# Altium PCB PCB.PcbDoc
Units mil, origin at the board's own origin, x right, y up, seen from the top; angles counter-clockwise.
Board outline 4230 x 3870 mil, 2 copper layers (Top Layer, Bottom Layer); 73 components, 41 nets, 199 pads, 0 vias.
Unrouted connection lines stored in the file: 152.
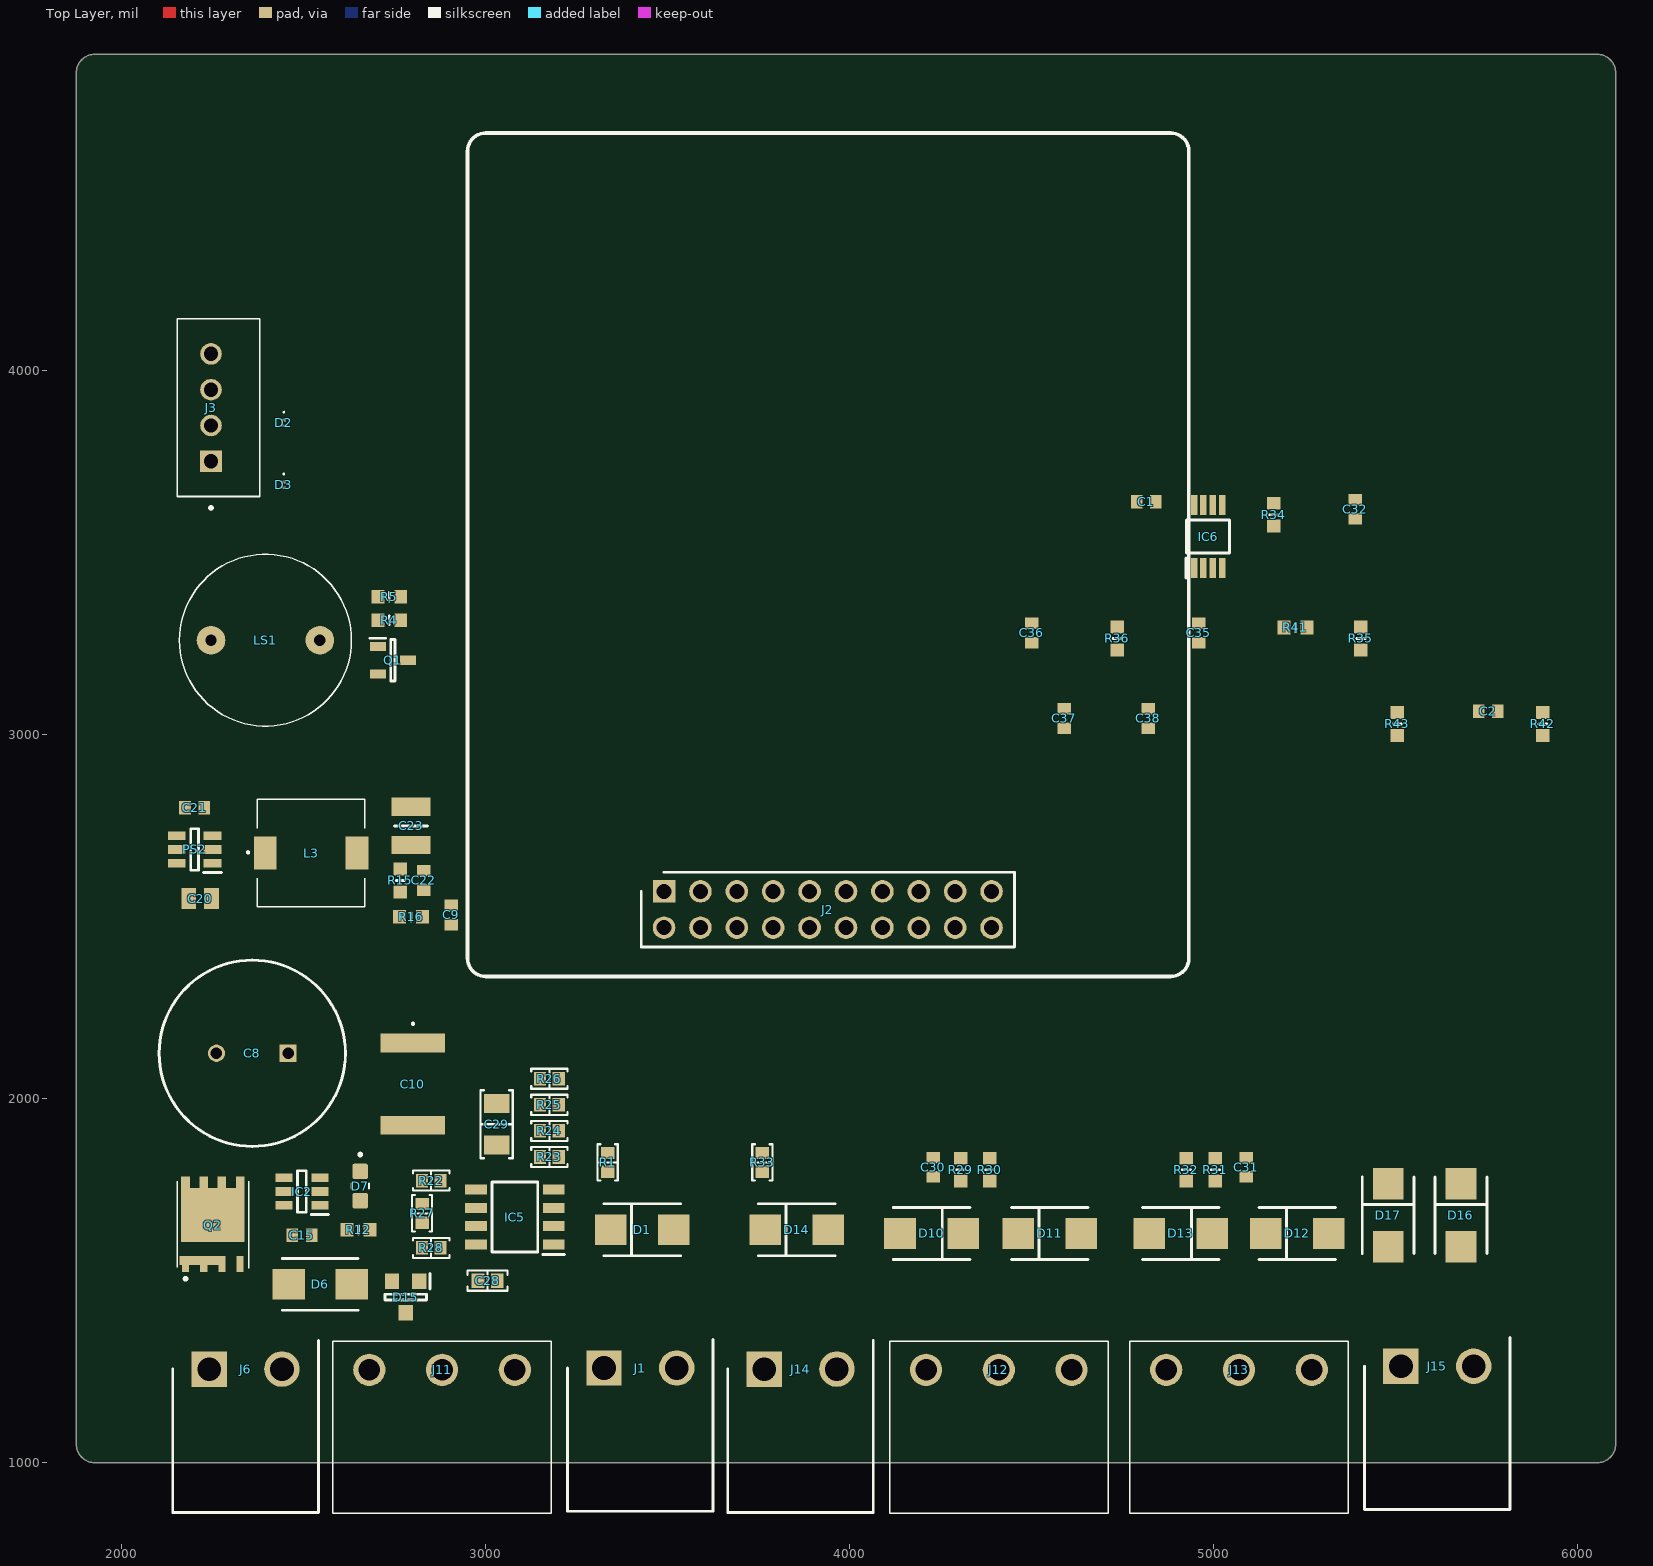
[diagram p0: Top Layer view]
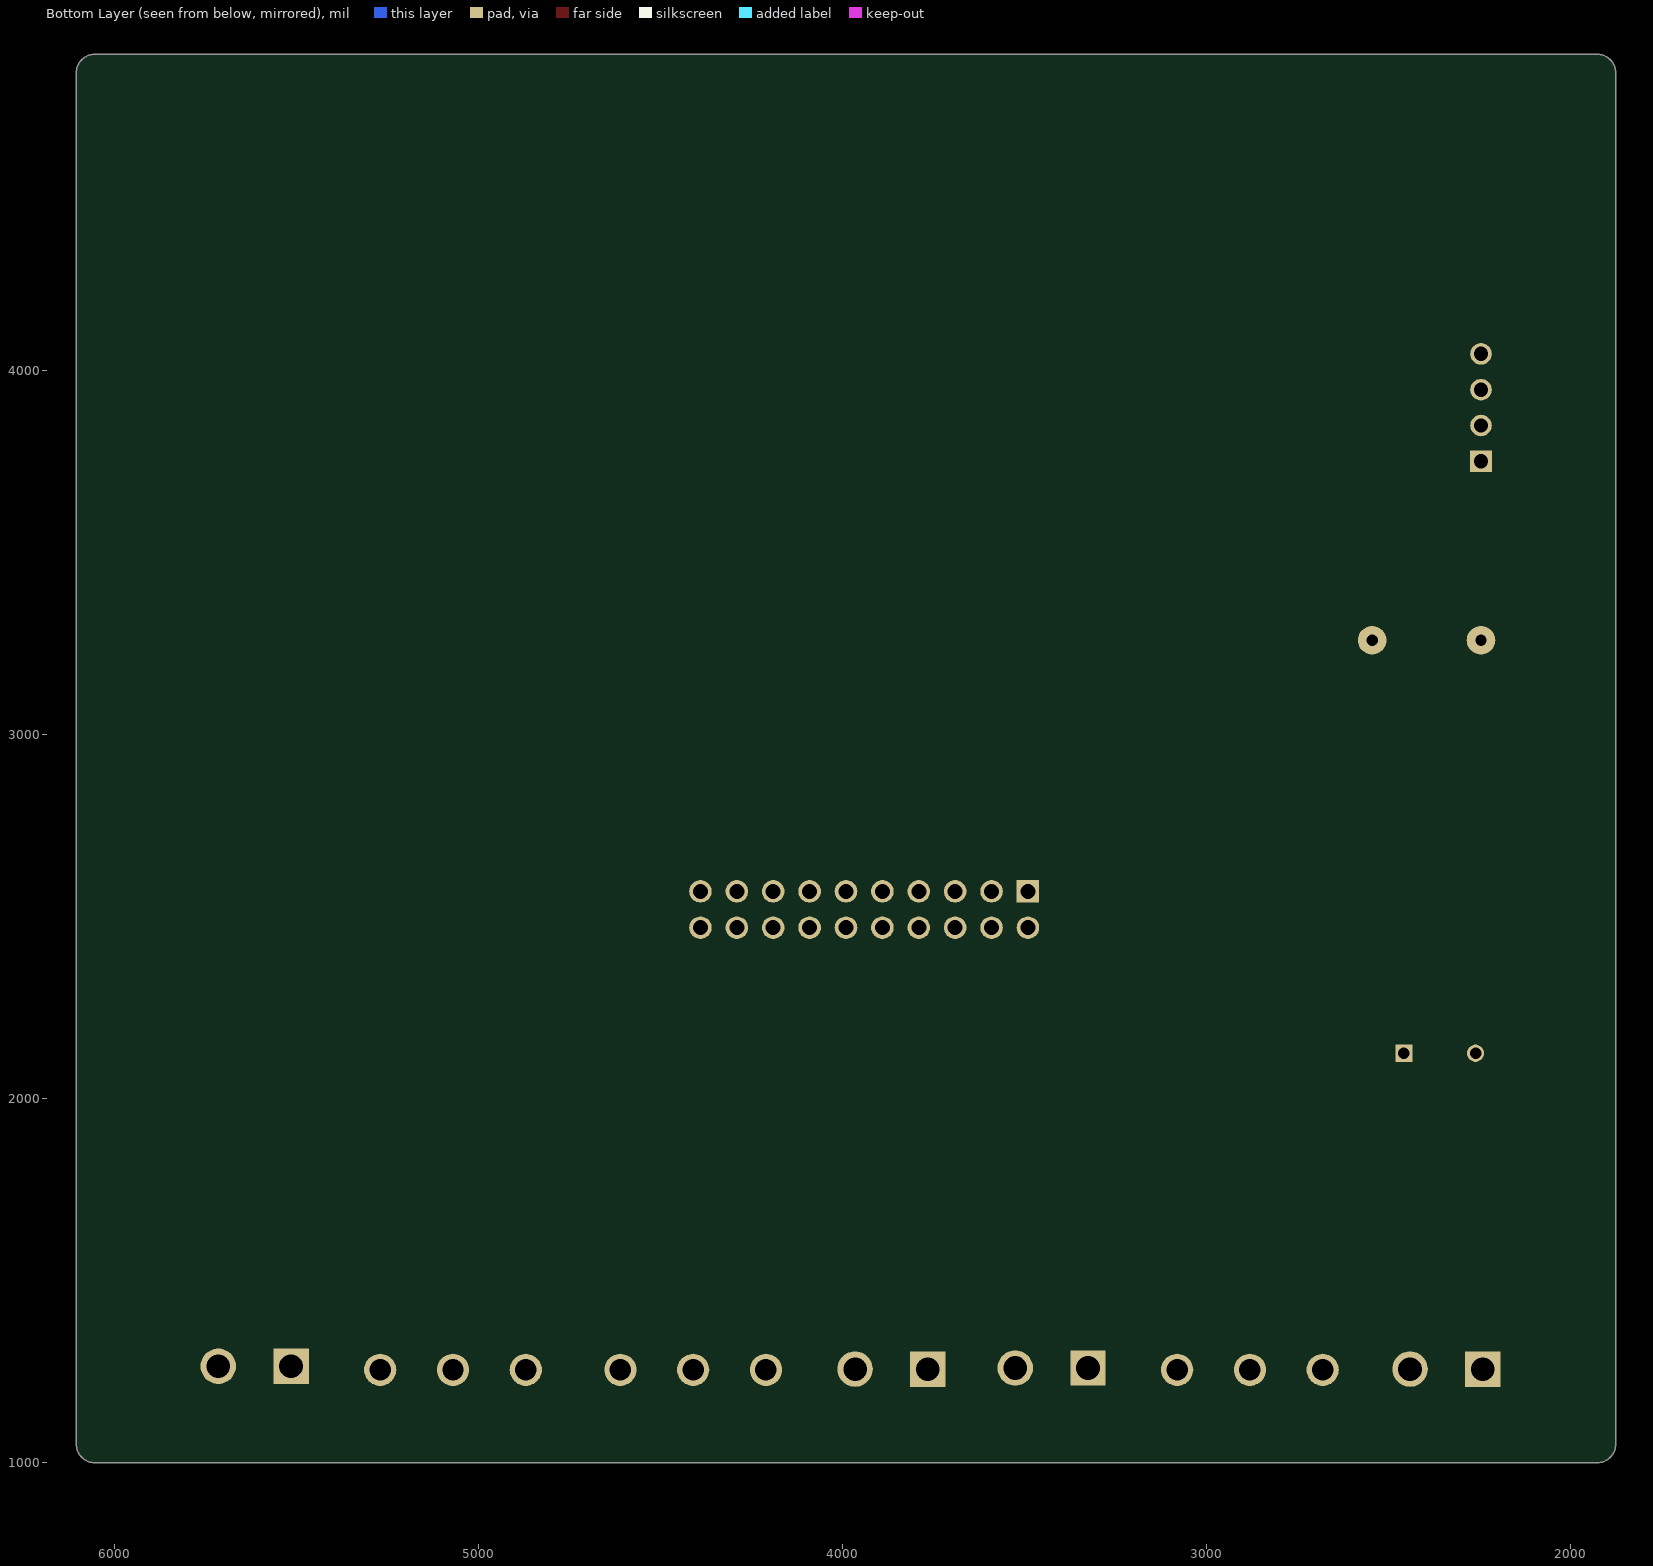
[diagram p1: Bottom Layer view, seen from below]

## Layer stack, top to bottom
Top Solder: solder mask 0.4, Solder Resist, Dk 3.5
Top Layer: signal copper 1.4
Dielectric 1: dielectric 12.6, FR-4, Dk 4.8
Bottom Layer: signal copper 1.4
Bottom Solder: solder mask 0.4, Solder Resist, Dk 3.5

## Board outline
1875,1050 1875,4820 cw(c1925,4820) 1925,4870 6055,4870 cw(c6055,4820) 6105,4820 6105,1050 cw(c6055,1050) 6055,1000 1925,1000 cw(c1925,1050)

## Design rules (kind name [scope] priority, off if disabled: settings)
Clearance [All] p1: gap=10 ignorepadtopadclearanceinfootprint=FALSE except(0: Arc-Hole Track-Hole SMDPad-Hole THPad-Hole Via-Hole Fill-Hole Poly-Hole Region-Hole Text-Hole)
PolygonConnect [All] p1: connectstyle=Relief reliefconductorwidth=10 reliefentries=4 polygonreliefangle="90 Angle" airgapwidth=10
RoutingVias [All] p1: holewidth=28 width=50 viastyle="Through Hole" minholewidth=28 minwidth=50 maxholewidth=28 maxwidth=50
SolderMaskExpansion [All] p1: expansion=4 istentingtop=FALSE
Width [All] p1: maxlimit=10 minlimit=10 preferedwidth=10
30 further rules are at their usual default settings.

## Classes and differential pairs
component class RS485: C28 C29 D15 IC5 J11 R22 R23 R24 R25 R26 R27 R28
component class PWR: C8 C9 C10 C15 C20 C21 C22 C23 D6 D7 IC2 J6 L3 PS2 Q2 R12 R15 R16
component class Pinout: D1 D2 D3 J1 J2 J3 LS1 Q1 R1 R4 R5
component class DAC_OUT: D14 J14 R33
component class ADC: C1 C2 C30 C31 C32 C35 C36 C37 C38 D10 D11 D12 D13 D16 D17 IC6 J12 J13 J15 R29 R30 R31 R32 R34 R35 R36 R41 R42 R43

## Components (designator, comment, footprint, x,y, rotation, side; value= is the part's Value field where it differs from the comment)
C1 "0.1 uF" CAP0603 4815,3640 r0 top
C2 "0.1 uF" CAP0603 5755,3065 r0 top
C8 "MAL213651471E3" CAPPRD500W60D1300H2700 2456.85,2125 r180 top
C9 "2.2 uF" CAP0603 2905,2505 r270 top
C10 "C5750X5R1H106K230KA" C5750_Commercial 2800,2040 r270 top
C15 "0.1 uF" CAP0603 2495,1625 r0 top
C20 "C0805C104M5RAC-TU" CAPC2012X88N 2215,2550 r180 top
C21 "C5750X5R1H106K230KA" CAP0603 2200,2800 r0 top
C22 "CGA1A2C0G1E820J030BA" CAP0603 2830,2600 r90 top
C23 "GRM32ER61C476KE15L" CAPC3225X270N 2795,2750 r270 top
C28 "0.1 µF" "CAP 0603_1608" 3005,1500 r180 top
C29 "10µF" "CAP 1206_3216 - 1.8MM" 3030,1930 r270 top
C30 "0.1 uF" CAP0603 4230,1811.89 r270 top
C31 "0.1 uF" CAP0603 5090,1811.89 r270 top
C32 "0.1 uF" CAP0603 5390,3620 r90 top
C35 "0.1 uF" CAP0603 4960,3280 r90 top
C36 "10 uF" CAP0603 4500,3280 r90 top
C37 "10 uF" CAP0603 4590,3045 r90 top
C38 "0.1 uF" CAP0603 4820,3045 r90 top
D1 "SMBJ5.0A" SMBJ12A 3430,1640 r0 top
D2 "DESD3V3Z1BCSF-7" DESD3V3Z1BCSF7 2445,3857.13 r270 top
D3 "DESD3V3Z1BCSF-7" DESD3V3Z1BCSF7 2445,3687.13 r270 top
D6 "SMBJ24CA-13-F" DIONM5336X250N 2545,1490 r0 top
D7 "LED_SMD" LEDSC125X200X90-2N 2655,1760 r270 top
D10 "SMBJ5.0A" SMBJ12A 4225,1630 r180 top
D11 "SMBJ5.0A" SMBJ12A 4550,1630 r0 top
D12 "SMBJ5.0A" SMBJ12A 5230,1630 r0 top
D13 "SMBJ5.0A" SMBJ12A 4910,1630 r180 top
D14 "SMBJ5.0A" SMBJ12A 3855,1640 r0 top
D15 "SM712" SOT95P240X115-3N 2780,1455 r270 top
D16 "SMBJ5.0A" SMBJ12A 5680,1680 r270 top
D17 "SMBJ5.0A" SMBJ12A 5480,1680 r270 top
IC2 "LM74700QDBVTQ1" SOT95P280X145-6N 2495,1745 r180 top
IC5 "MAX485ECSA+" SOIC127P600X175-8N 3080,1675 r180 top
IC6 "INA317IDGKR" SOP65P490X110-8N 4985,3545 r90 top
J1 "282815-2" SHDRRA2W102P0X508_1X2_1016X1200X850P 3325,1260 r180 top
J2 "10-89-7200" HDRV20W87P254_2X10_2553X508X864P 3490,2570 r180 top locked
J3 "DISPLAY" JST_B4B-XH-A(LF)(SN) 2265.67,3899.21 r270 top
J6 "282815-2" SHDRRA2W102P0X508_1X2_1016X1200X850P 2240,1256.97 r180 top
J11 "282815-3" 2828153 2680,1255 r0 top
J12 "282815-3" 2828153 4210,1255 r0 top
J13 "282815-3" 2828153 4870,1255 r0 top
J14 "282815-2" SHDRRA2W102P0X508_1X2_1016X1200X850P 3765,1256.97 r180 top
J15 "282815-2" SHDRRA2W102P0X508_1X2_1016X1200X850P 5515,1265 r180 top
L3 "PA4302.103NLT" PA4302103NLT 2520,2675 r90 top
LS1 "CMI-1295IC-0585T" CMI1295IC0585T 2544.21,3260 r180 top
PS2 "TPS54202DDCR" SOT95P280X110-6N 2200,2685 r180 top
Q1 "DMG3415U-7" SOT96P240X110-3N 2745,3205 r0 top
Q2 "BSC014N06NSATMA1" BSC010N04LS6ATMA1 2250,1655 r0 top
R1 "10 kOhms" "RES 0603_1608" 3335,1825 r270 top
R4 "300R" RES0603 2735,3315 r0 top
R5 "10K" RES0603 2735,3380 r0 top
R12 "1K" RES0603 2650,1640 r0 top
R15 "CRCW0402100KFKEDHP" RES0603 2765,2600 r90 top
R16 "CRCW040213K7FKEDHP" RES0603 2795,2500 r180 top
R22 "20 kOhms" "RES 0603_1608" 2850,1775 r0 top
R23 "10 kOhms" "RES 0603_1608" 3175,1840 r180 top
R24 "10 kOhms" "RES 0603_1608" 3175,1911.67 r180 top
R25 "10 kOhms" "RES 0603_1608" 3175,1983.33 r180 top
R26 "10 kOhms" "RES 0603_1608" 3175,2055 r180 top
R27 "120" "RES 0603_1608" 2825,1685 r270 top
R28 "20 kOhms" "RES 0603_1608" 2850,1590 r180 top
R29 "68k" RES0603 4305,1805 r90 top
R30 "10K" RES0603 4385,1805 r270 top
R31 "68k" RES0603 5005,1805 r90 top
R32 "10K" RES0603 4925,1805 r270 top
R33 "10 kOhms" "RES 0603_1608" 3760,1825 r270 top
R34 "100R" RES0603 5165,3605 r90 top
R35 "100R" RES0603 5405,3265 r90 top
R36 "100R" RES0603 4735,3265 r90 top
R41 "10K" RES0603 5225,3295 r0 top
R42 "10K" RES0603 5905,3030 r90 top
R43 "10K" RES0603 5505,3030 r90 top

## Footprints (in the part's own frame and the unit in brackets; to place one, negate y for a bottom-side part, rotate by r counter-clockwise, add the part's x,y. Pads: shape width x height; smd on the part's side, far side on the other; paste and mask are expansions set on the pad)
2828153 [mm]
  round 2.25 hole 1.5: 1(0,0) 2(5.08,0) 3(10.16,0)
  silkscreen extent -2.54,-10 12.7,2, body extent -2.54,-10 12.7,2, height 8.46
BSC010N04LS6ATMA1 [mm]
  rect 0.5x0.5 smd: 1(-1.905,-3.075) 2(-0.635,-3.075) 3(0.635,-3.075)
  rect 0.5x1.1 smd: 4(1.905,-2.775)
  rect 0.6x0.8 smd: 5(1.905,2.925) 6(0.635,2.925) 7(-0.635,2.925) 8(-1.905,2.925)
  rect 4.41x3.75 smd: 9(0,0.65)
  rect 3.2x0.6 smd: 10(-0.715,-2.525)
  silkscreen extent -2.5,-3.9 2.5,3, body extent -2.7,-3.08 2.7,3.08, height 1.1
C5750_Commercial [mm]
  rect 1.3x4.5 smd: 1(-2.875,0) 2(2.875,0)
  silkscreen extent -4.27,-0.05 -4.18,0.05, body extent -2.65,-2.45 2.65,2.45, height 2.77
CAP0603 [mm]
  rect 0.81x0.94 smd: 1(-0.67,0) 2(0.67,0)
  body extent -0.8,-0.4 0.8,0.4, height 0.9
"CAP 0603_1608" [mm]
  rect 0.9x1 smd: 1(-0.675,0) 2(0.675,0)
  silkscreen extent -1.4,-0.7 1.4,0.7, body extent -0.8,-0.41 0.8,0.41, height 0.82
"CAP 1206_3216 - 1.8MM" [mm]
  rect 1.3x1.8 smd: 1(-1.45,0) 2(1.45,0)
  silkscreen extent -2.37,-1.12 2.37,1.12, body extent -1.6,-0.8 1.6,0.8, height 1.8
CAPC2012X88N [mm]
  rect 1.02x1.47 smd: 1(-0.8,0) 2(0.8,0)
  body extent -1.1,-0.73 1.1,0.72, height 0.88
CAPC3225X270N [mm]
  rect 1.26x2.72 smd: 1(-1.33,0) 2(1.33,0)
  silkscreen extent 0,-1.15 0,1.15, body extent -1.6,-1.25 1.6,1.25, height 2.7
CAPPRD500W60D1300H2700 [mm]
  rect 1.2x1.2 hole 0.8: 1(0,0)
  round 1.2 hole 0.8: 2(5,0)
  silkscreen extent -4,-6.5 9,6.5, body extent -3.96,-6.49 9.03,6.49, height 25
CMI1295IC0585T [mm]
  round 2 hole 0.8: 1(0,0) 2(7.6,0)
  silkscreen extent -2.2,-6 9.8,6, body extent -2.19,-5.99 9.81,6, height 9.63
DESD3V3Z1BCSF7 [mm]
  rect 0.194x0.291 smd: 1(-0.2,0) 2(0.2,0)
  silkscreen extent -0.8,-0.05 -0.7,0.05, body extent -0.3,-0.15 0.3,0.15, height 0.42
DIONM5336X250N [mm]
  rect 2.25x2.15 smd: 1(-2.2,0) 2(2.2,0)
  silkscreen extent -2.65,-1.81 2.65,1.81, body extent -2.8,-1.97 2.8,1.97, height 2.57
HDRV20W87P254_2X10_2553X508X864P [mm]
  rect 1.575x1.575 hole 1.05: 1(0,0)
  round 1.575 hole 1.05: 2(0,2.54) 3(-2.54,0) 4(-2.54,2.54) 5(-5.08,0) 6(-5.08,2.54) 7(-7.62,0) 8(-7.62,2.54) 9(-10.16,0) 10(-10.16,2.54) 11(-12.7,0) 12(-12.7,2.54) 13(-15.24,0) 14(-15.24,2.54) 15(-17.78,0) 16(-17.78,2.54) 17(-20.32,0) 18(-20.32,2.54) 19(-22.86,0) 20(-22.86,2.54)
  silkscreen extent -24.45,-1.34 1.59,3.88, body extent -24.13,-1.27 1.27,3.81, height 8.45
JST_B4B-XH-A(LF)(SN) [mm]
  rect 1.508x1.508 / inner round 1.508 / far side rect 1.508x1.508 hole 1: 1(3.75,-0.525)
  round 1.508 hole 1: 2(1.25,-0.525) 3(-1.25,-0.525) 4(-3.75,-0.525)
  silkscreen extent -6.2,-2.88 7.1,2.88, body extent -6.2,-2.88 6.2,2.88, height 7
LEDSC125X200X90-2N [mm]
  rrect25% 1.07x1.08 smd: A(1.025,0) C(-1.025,0)
  silkscreen extent -2.3,-0.63 0.17,0.63, body extent -1,-0.63 1,0.63, height 0.7
PA4302103NLT [mm]
  rect 2.3x1.6 smd: 1(0,3.2) 2(0,-3.2)
  silkscreen extent -3.75,-3.75 3.75,4.45, body extent -3.75,-3.84 3.75,3.84, height 5.7
RES0603 [mm]
  rect 0.9x0.95 smd: 1(-0.8,0) 2(0.8,0)
  silkscreen extent 0,-0.3 0,0.3, body extent -0.8,-0.4 0.8,0.4, height 0.55
"RES 0603_1608" [mm]
  rect 0.85x0.95 smd: 1(-0.65,0) 2(0.65,0)
  silkscreen extent -1.27,-0.7 1.27,0.7, body extent -0.8,-0.4 0.8,0.4, height 0.45
SHDRRA2W102P0X508_1X2_1016X1200X850P [mm]
  rect 2.475x2.475 hole 1.65: 1(0,0)
  round 2.475 hole 1.65: 2(-5.08,0)
  silkscreen extent -7.62,-2 2.54,10, body extent -7.62,-2 2.54,10, height 8.35
SMBJ12A [mm]
  rect 2.2x2.15 smd: 1(-2.2,0) 2(2.2,0)
  silkscreen extent -2.68,-1.81 2.68,1.81, body extent -2.68,-1.86 2.68,1.86, height 2.33
SOIC127P600X175-8N [mm]
  rect 1.525x0.7 smd: 1(-2.712,1.905) 2(-2.712,0.635) 3(-2.712,-0.635) 4(-2.712,-1.905) 5(2.712,-1.905) 6(2.712,-0.635) 7(2.712,0.635) 8(2.712,1.905)
  silkscreen extent -3.47,-2.45 1.6,2.61, body extent -3,-2.45 3,2.45, height 1.75
SOP65P490X110-8N [mm]
  rect 1.4x0.45 smd: 1(-2.2,0.975) 2(-2.2,0.325) 3(-2.2,-0.325) 4(-2.2,-0.975) 5(2.2,-0.975) 6(2.2,-0.325) 7(2.2,0.325) 8(2.2,0.975)
  silkscreen extent -2.9,-1.5 1.15,1.55, body extent -2.45,-1.5 2.45,1.5, height 1.1
SOT95P240X115-3N [mm]
  rect 1.1x1 smd: 1(-1.1,0.95) 2(-1.1,-0.95) 3(1.1,0)
  silkscreen extent -1.65,-1.45 0.2,1.7, body extent -1.2,-1.45 1.2,1.45, height 1.15
SOT95P280X110-6N [mm]
  rect 1.25x0.6 smd: 1(-1.25,0.95) 2(-1.25,0) 3(-1.25,-0.95) 4(1.25,-0.95) 5(1.25,0) 6(1.25,0.95)
  silkscreen extent -1.88,-1.45 0.28,1.6, body extent -1.4,-1.45 1.4,1.45, height 1.1
SOT95P280X145-6N [mm]
  rect 1.2x0.6 smd: 1(-1.25,0.95) 2(-1.25,0) 3(-1.25,-0.95) 4(1.25,-0.95) 5(1.25,0) 6(1.25,0.95)
  silkscreen extent -1.85,-1.45 0.3,1.6, body extent -1.4,-1.45 1.4,1.45, height 1.2
SOT96P240X110-3N [mm]
  rect 1.1x0.65 smd: 1(-1.05,0.96) 2(-1.05,-0.96) 3(1.05,0)
  silkscreen extent -1.6,-1.45 0.15,1.54, body extent -1.2,-1.45 1.2,1.45, height 1.1

## Part data
C1 C2 C9 C15 C30 C31 C32 C35 C36 C37 C38: library part CC0603KRX7R9BB104, "Capacitor", Manufacturer_Name=YAGEO, Mouser Part Number=603-CC603KRX7R9BB104, Arrow Part Number=CC0603KRX7R9BB104, Arrow Price/Stock=https://www.arrow.com/en/products/cc0603krx7r9bb104/yageo?utm_currency=USD&region=europe, Datasheet Link=https://componentsearchengine.com/Datasheets/2/CC0603KRX7R9BB104.pdf, Height=0.9mm, Manufacturer_Part_Number=CC0603KRX7R9BB104, Mouser Price/Stock=https://www.mouser.co.uk/ProductDetail/YAGEO/CC0603KRX7R9BB104?qs=vTakOoo5QyLvVCYM2ge8LQ%3D%3D
C8: "Capacitor Polarised", Manufacturer_Name=Vishay, Mouser Part Number=594-2222-136-51471, Datasheet Link=https://www.mouser.co.uk/datasheet/2/427/136rvi-1762300.pdf, Height=27mm, Manufacturer_Part_Number=MAL213651471E3, Mouser Price/Stock=https://www.mouser.co.uk/ProductDetail/Vishay-BC-Components/MAL213651471E3?qs=zGH8QOQ14qXx9%252BWDTpPwWA%3D%3D
C10 C21: "Capacitor", Manufacturer_Name=TDK, Mouser Part Number=810-C5750X5R1H106K, Arrow Part Number=C5750X5R1H106K230KA, Arrow Price/Stock=https://www.arrow.com/en/products/c5750x5r1h106k230ka/tdk?region=nac, Datasheet Link=https://product.tdk.com/system/files/dam/doc/product/capacitor/ceramic/mlcc/catalog/mlcc_commercial_general_en.pdf, Height=2.5mm, Manufacturer_Part_Number=C5750X5R1H106K230KA, Mouser Price/Stock=https://www.mouser.co.uk/ProductDetail/TDK/C5750X5R1H106K230KA?qs=NRhsANhppD8lVYAvl0MZ3g%3D%3D
C20: "Capacitor", Manufacturer_Name="Yageo Group", Arrow Part Number=C0805C104M5RAC-TU, Arrow Price/Stock=https://www.arrow.com/en/products/c0805c104m5ractu/kemet-corporation?region=nac, Datasheet Link=https://connect.kemet.com:7667/gateway/IntelliData-ComponentDocumentation/1.0/download/specsheet/C0805C104M5RACTU, Height=0.88mm, Manufacturer_Part_Number=C0805C104M5RAC-TU
C22: "Capacitor", Manufacturer_Name=TDK, Datasheet Link=https://product.tdk.com/system/files/dam/doc/product/capacitor/ceramic/mlcc/catalog/mlcc_automotive_general_en.pdf, Height=0.33mm, Manufacturer_Part_Number=CGA1A2C0G1E820J030BA
C23: "Capacitor", Manufacturer_Name="Murata Electronics", Mouser Part Number=81-GRM32ER61C476KE5L, Arrow Part Number=GRM32ER61C476KE15L, Arrow Price/Stock=https://www.arrow.com/en/products/grm32er61c476ke15l/murata-manufacturing?utm_currency=USD&region=europe, Datasheet Link=https://search.murata.co.jp/Ceramy/image/img/A01X/G101/ENG/GRM32ER61C476KE15-01A.pdf, Height=2.7mm, Manufacturer_Part_Number=GRM32ER61C476KE15L, Mouser Price/Stock=https://www.mouser.co.uk/ProductDetail/Murata-Electronics/GRM32ER61C476KE15L?qs=%252B%2F7tQhzlcy7Im%2F1Gh2YSGQ%3D%3D
C28: library part C0603C104K5RAC7411, "CAP CER 0.1UF 50V X7R 0603", Device Package="0603 (1608 Metric)", manufacturer=KEMET, Operating Temperature="-55°C ~ 125°C", Supplier Part Number 1=399-7374-2-ND, Temperature Coefficient=X7R, Tolerance=±10%, Voltage - Rated=50V, Applications="Bypass, Decoupling", Capacitance="0.1 µF", componentlink1description=Datasheet, componentlink1url=https://api.kemet.com/component-edge/download/datasheet/C0603C104K5RAC7411.pdf, componentlink2description="DigiKey Link", componentlink2url=https://www.digikey.com/en/products/detail/kemet/C0603C104K5RAC7411/3317013, lastupdated="9/19/2022 1:01:20 PM", Lifecycle Status=Active, Minimum Order=15000, Mounting Type="Surface Mount, MLCC", Package / Case="0603 (1608 Metric)", packaging=TapeAndReel, Part Number=C0603C104K5RAC7411, Part Status=Active, partid=2233, Price=0.01, series="SMD Comm X7R", Size / Dimension="0.063\" L x 0.031\" W (1.60mm x 0.80mm)", Supplier 1=DigiKey, Thickness (Max)="0.035\" (0.90mm)"
C29: library part 12065D106KAT2A, "CAP CER 10UF 50V X5R 1206", Device Package="1206 (3216 Metric)", manufacturer="AVX Corporation", Operating Temperature="-55°C ~ 85°C", Supplier Part Number 1=478-9979-1-ND, Temperature Coefficient=X5R, Tolerance=±10%, Voltage - Rated=50V, Applications="General Purpose", Capacitance=10µF, componentlink1description=Datasheet, componentlink1url=http://datasheets.avx.com/cx5r.pdf, componentlink2description="DigiKey Link", componentlink2url=http://digikey.com/product-detail/en/avx-corporation/12065D106KAT2A/478-9979-1-ND/6149060, lastupdated="9/2/2020 1:05:35 AM", Lifecycle Status=Active, Minimum Order=1, Mounting Type="Surface Mount, MLCC", Package / Case="1206 (3216 Metric)", packaging=TapeAndReel, Part Number=12065D106KAT2A, Part Status=Active, partid=21345, Price=0.16, series=-, Size / Dimension="0.126\" L x 0.063\" W (3.20mm x 1.60mm)", Supplier 1=DigiKey, Thickness (Max)="0.071\" (1.80mm)"
D1 D10 D11 D12 D13 D14 D16 D17: "TVS Diode (Uni-directional)", Manufacturer_Name=STMicroelectronics, Datasheet Link=https://www.st.com/resource/en/datasheet/smbj12a.pdf, Height=2.45mm, Manufacturer_Part_Number=SMBJ5.0A
D2 D3: "TVS Diode (Bi-directional)", Manufacturer_Name="Diodes Incorporated", Mouser Part Number=621-DESD3V3Z1BCSF-7, Arrow Part Number=DESD3V3Z1BCSF-7, Arrow Price/Stock=https://www.arrow.com/en/products/desd3v3z1bcsf-7/diodes-incorporated?utm_currency=USD&region=nac, Datasheet Link=https://www.diodes.com/assets/Package-Files/X2-WLB0603-2.pdf, Height=0.32mm, Manufacturer_Part_Number=DESD3V3Z1BCSF-7, Mouser Price/Stock=https://www.mouser.co.uk/ProductDetail/Diodes-Incorporated/DESD3V3Z1BCSF-7?qs=HXFqYaX1Q2xS5VnKZuyjmg%3D%3D
D6: "TVS Diode (Bi-directional)", Manufacturer_Name="Diodes Incorporated", Mouser Part Number=621-SMBJ24CA-13-F, Arrow Part Number=SMBJ24CA-13-F, Arrow Price/Stock=https://www.arrow.com/en/products/smbj24ca-13-f/diodes-incorporated?utm_currency=USD&region=nac, Datasheet Link=https://www.diodes.com/assets/Datasheets/ds19002.pdf, Height=2.5mm, Manufacturer_Part_Number=SMBJ24CA-13-F, Mouser Price/Stock=https://www.mouser.co.uk/ProductDetail/Diodes-Incorporated/SMBJ24CA-13-F?qs=gaDBXWSqsDCkhBi9r6ReOQ%3D%3D
D7: library part 5990110007F, "Red 633nm LED Indication - Discrete 2.1V 0805 (2012 Metric)", Package="0805 Dialight", Availability="In Stock", Check_prices=https://www.snapeda.com/parts/599-0110-007F/Dialight/view-part/?ref=eda, MF=Dialight, MP=599-0110-007F, Price=None, Purchase-URL=https://pricing.snapeda.com/search/part/599-0110-007F/?ref=eda, SnapEDA_Link=https://www.snapeda.com/parts/599-0110-007F/Dialight/view-part/?ref=snap
D15: "TVS Diode (Bi-directional)", Manufacturer_Name=DOWO, Datasheet Link=https://datasheet.lcsc.com/szlcsc/DOWO-SM712_C293966.pdf, Height=1.15mm, Manufacturer_Part_Number=SM712
IC2: library part LM74700-Q1MKX-1_NOPB, "Integrated Circuit", Manufacturer_Name="Texas Instruments", Manufacturer_Part_Number=LM74700-Q1MKX-1/NOPB, Datasheet Link=http://www.ti.com/lit/ds/symlink/lm74700-q1.pdf, Height=1.45mm
IC5: "Integrated Circuit", Manufacturer_Name="Analog Devices", Mouser Part Number=700-MAX485ECSA, Arrow Part Number=MAX485ECSA+, Arrow Price/Stock=https://www.arrow.com/en/products/max485ecsa/analog-devices?utm_currency=USD&region=nac, Datasheet Link=http://datasheets.maximintegrated.com/en/ds/MAX1487E-MAX491E.pdf, Height=1.75mm, Manufacturer_Part_Number=MAX485ECSA+, Mouser Price/Stock=https://www.mouser.co.uk/ProductDetail/Analog-Devices-Maxim-Integrated/MAX485ECSA%2b?qs=1THa7WoU59Gy3FCdT5o1Tg%3D%3D
IC6: "Integrated Circuit", Manufacturer_Name="Texas Instruments", Mouser Part Number=595-INA317IDGKR, Arrow Part Number=INA317IDGKR, Arrow Price/Stock=https://www.arrow.com/en/products/ina317idgkr/texas-instruments?utm_currency=USD&region=nac, Datasheet Link=http://www.ti.com/lit/gpn/ina317, Height=1.1mm, Manufacturer_Part_Number=INA317IDGKR, Mouser Price/Stock=https://www.mouser.co.uk/ProductDetail/Texas-Instruments/INA317IDGKR?qs=W0yvOO0ixfHq371pIwwl1g%3D%3D
J1 J6 J14 J15: "Connector", Manufacturer_Name="TE Connectivity", Mouser Part Number=571-282815-2, Arrow Part Number=282815-2, Arrow Price/Stock=https://www.arrow.com/en/products/282815-2/te-connectivity?region=nac, Datasheet Link=https://www.te.com/commerce/DocumentDelivery/DDEController?Action=srchrtrv&DocNm=1-773958-1&DocType=Data%20Sheet&DocLang=English&PartCntxt=282815-2&DocFormat=pdf, Height=8.5mm, Manufacturer_Part_Number=282815-2, Mouser Price/Stock=https://www.mouser.co.uk/ProductDetail/TE-Connectivity/282815-2?qs=79%2FjLZ2kXkpF7MFURi982A%3D%3D
J2: "Connector", Manufacturer_Name=Molex, Mouser Part Number=538-10-89-7200, Datasheet Link=https://www.molex.com/content/dam/molex/molex-dot-com/products/automated/en-us/salesdrawingpdf/702/70280/010897200_sd.pdf?inline, Height=8.64mm, Manufacturer_Part_Number=10-89-7200, Mouser Price/Stock=https://www.mouser.co.uk/ProductDetail/Molex/10-89-7200?qs=oWQp3ZoCHH25CPUgqQXm8A%3D%3D
J3: library part B4B-XH-A(LF)(SN), "Connector Header Through Hole 4 position 0.098 (2.50mm)", Package=None, Check_prices=https://www.snapeda.com/parts/B4B-XH-A(LF)(SN)/JST+Sales+America+Inc./view-part/?ref=eda, MF="JST Sales", MP=B4B-XH-A(LF)(SN), SnapEDA_Link=https://www.snapeda.com/parts/B4B-XH-A(LF)(SN)/JST+Sales+America+Inc./view-part/?ref=snap
J11 J12 J13: "Connector", Manufacturer_Name="TE Connectivity", Mouser Part Number=571-282815-3, Arrow Part Number=282815-3, Arrow Price/Stock=https://www.arrow.com/en/products/282815-3/te-connectivity, Datasheet Link=https://www.te.com/commerce/DocumentDelivery/DDEController?Action=srchrtrv&DocNm=1-773958-1&DocType=Data%20Sheet&DocLang=English&PartCntxt=282815-3&DocFormat=pdf, Height=8.35mm, Manufacturer_Part_Number=282815-3, Mouser Price/Stock=https://www.mouser.co.uk/ProductDetail/TE-Connectivity/282815-3?qs=79%2FjLZ2kXkqd6grVMiPYfw%3D%3D
L3: "Inductor", Manufacturer_Name="Yageo Group", Mouser Part Number=673-PA4302.103NLT, Arrow Part Number=PA4302.103NLT, Arrow Price/Stock=https://www.arrow.com/en/products/pa4302.103nlt/pulse-electronics-corporation?region=nac, Datasheet Link=https://www.mouser.com/datasheet/2/336/-559356.pdf, Height=5.6mm, Manufacturer_Part_Number=PA4302.103NLT, Mouser Price/Stock=https://www.mouser.co.uk/ProductDetail/Pulse-Electronics/PA4302.103NLT?qs=ZU1dyKYMvyPXoPwo6qMOJg%3D%3D
LS1: "Loudspeaker or Buzzer", Manufacturer_Name="Same Sky", Mouser Part Number=490-CMI-1295IC-0585T, Arrow Part Number=CMI-1295IC-0585T, Arrow Price/Stock=https://www.arrow.com/en/products/cmi-1295ic-0585t/cui-devices?utm_currency=USD&region=nac, Datasheet Link=https://www.sameskydevices.com/product/resource/CMI-1295IC-0585T.pdf, Height=9.7mm, Manufacturer_Part_Number=CMI-1295IC-0585T, Mouser Price/Stock=https://www.mouser.co.uk/ProductDetail/Same-Sky/CMI-1295IC-0585T?qs=OlC7AqGiEDkuskN%2Fok3iNw%3D%3D
PS2: "Power Supply", Manufacturer_Name="Texas Instruments", Mouser Part Number=595-TPS54202DDCR, Arrow Part Number=TPS54202DDCR, Arrow Price/Stock=https://www.arrow.com/en/products/tps54202ddcr/texas-instruments?utm_currency=USD&region=nac, Datasheet Link=http://www.ti.com/lit/gpn/tps54202, Height=1.1mm, Manufacturer_Part_Number=TPS54202DDCR, Mouser Price/Stock=https://www.mouser.co.uk/ProductDetail/Texas-Instruments/TPS54202DDCR?qs=uP22XH7NdCsJtN%2Fq54jCtQ%3D%3D
Q1: "Integrated Circuit", Manufacturer_Name="Lattice Semiconductor", Mouser Part Number=N/A, Datasheet Link=https://media.digikey.com/pdf/Data%20Sheets/Diodes%20PDFs/DMG3415U.pdf, Height=1.1mm, Manufacturer_Part_Number=DMG3415U-7, Mouser Price/Stock=https://www.mouser.com/Search/Refine.aspx?Keyword=N%2FA
Q2: "MOSFET (N-Channel)", Manufacturer_Name=Infineon, Mouser Part Number=726-BSC014N06NSATMA1, Arrow Part Number=BSC014N06NSATMA1, Arrow Price/Stock=https://www.arrow.com/en/products/bsc014n06nsatma1/infineon-technologies-ag?region=nac, Datasheet Link=http://www.farnell.com/datasheets/1849651.html, Height=1.1mm, Manufacturer_Part_Number=BSC014N06NSATMA1, Mouser Price/Stock=https://www.mouser.co.uk/ProductDetail/Infineon-Technologies/BSC014N06NSATMA1?qs=K00xGehIljshgUA78G26tg%3D%3D
R1 R23 R24 R25 R26 R33: library part RT0603FRE0710KL, "RES SMD 10K OHM 1% 1/10W 0603", Device Package="0603 (1608 Metric)", manufacturer=Yageo, Operating Temperature="-55°C ~ 155°C", Power (Watts)="0.1W, 1/10W", Supplier Device Package=0603, Supplier Part Number 1=YAG2321CT-ND, Temperature Coefficient=±50ppm/°C, Tolerance=±1%, componentlink1description=Datasheet, componentlink1url=https://www.yageo.com/upload/media/product/productsearch/datasheet/rchip/PYu-RT_1-to-0.01_RoHS_L_11.pdf, componentlink2description="DigiKey Link", componentlink2url=https://www.digikey.com/en/products/detail/yageo/RT0603FRE0710KL/1075040, Composition="Thin Film", Height - Seated (Max)="0.022\" (0.55mm)", lastupdated="9/19/2022 1:22:31 PM", Lifecycle Status=Active, Minimum Order=1, Number of Terminations=2, Package / Case="0603 (1608 Metric)", packaging=TapeAndReel, Part Number=RT0603FRE0710KL, Part Status=Active, partid=5671, Price=0.01, Resistance="10 kOhms", series=RT, Size / Dimension="0.063\" L x 0.031\" W (1.60mm x 0.80mm)", Supplier 1=DigiKey
R4 R5 R12 R29 R30 R31 R32 R34 R35 R36 R41 R42 R43: library part RES, "Resistor", Manufacturer_Name="UNI-ROYAL(Uniroyal Elec)", Manufacturer_Part_Number=0603WAF1001T5E, Datasheet Link=https://datasheet.lcsc.com/szlcsc/Uniroyal-Elec-0603WAF1001T5E_C21190.pdf, Height=0.55mm
R15: "Resistor", Manufacturer_Name=Vishay, Mouser Part Number=71-CRCW0402100KFKEDH, Arrow Part Number=CRCW0402100KFKEDHP, Arrow Price/Stock=https://www.arrow.com/en/products/crcw0402100kfkedhp/vishay?utm_currency=USD&region=nac, Datasheet Link=http://www.vishay.com/docs/20035/dcrcwe3.pdf, Height=0.4mm, Manufacturer_Part_Number=CRCW0402100KFKEDHP, Mouser Price/Stock=https://www.mouser.co.uk/ProductDetail/Vishay-Dale/CRCW0402100KFKEDHP?qs=k2%2FDWSARqgGFakjlJe4Ejw%3D%3D
R16: "Resistor", Manufacturer_Name=Vishay, Mouser Part Number=N/A, Arrow Part Number=CRCW040213K7FKEDHP, Arrow Price/Stock=https://www.arrow.com/en/products/crcw040213k7fkedhp/vishay?region=nac, Datasheet Link=http://www.vishay.com/docs/20035/dcrcwe3.pdf, Height=0.4mm, Manufacturer_Part_Number=CRCW040213K7FKEDHP, Mouser Price/Stock=https://www.mouser.co.uk/ProductDetail/Vishay-Dale/CRCW040213K7FKEDHP?qs=VAB4DzKv5wWcbGmoe9QIoA%3D%3D
R22 R27 R28: library part RT0603FRE0710KL, "RES SMD 10K OHM 1% 1/10W 0603", Device Package="0603 (1608 Metric)", manufacturer=Yageo, Operating Temperature="-55°C ~ 155°C", Power (Watts)="0.1W, 1/10W", Resistance="10 kOhms", Supplier Device Package=0603, Supplier Part Number 1=YAG2321CT-ND, Temperature Coefficient=±50ppm/°C, Tolerance=±1%, componentlink1description=Datasheet, componentlink1url=https://www.yageo.com/upload/media/product/productsearch/datasheet/rchip/PYu-RT_1-to-0.01_RoHS_L_11.pdf, componentlink2description="DigiKey Link", componentlink2url=https://www.digikey.com/en/products/detail/yageo/RT0603FRE0710KL/1075040, Composition="Thin Film", Height - Seated (Max)="0.022\" (0.55mm)", lastupdated="9/19/2022 1:22:31 PM", Lifecycle Status=Active, Minimum Order=1, Number of Terminations=2, Package / Case="0603 (1608 Metric)", packaging=TapeAndReel, Part Number=RT0603FRE0710KL, Part Status=Active, partid=5671, Price=0.01, series=RT, Size / Dimension="0.063\" L x 0.031\" W (1.60mm x 0.80mm)", Supplier 1=DigiKey

## Nets (pads, with @x,y where several pads share a name; then routed paths per layer and width w, separated by ;. In a path a pad name is that pad's centre, name@x,y a point inside that pad or via, vN(x,y) a via of type N, cw(c..) or ccw(c..) an arc to the next point about the centre after c; other vN are vias at no path point)
+3.3: C32.1 IC6.7 J2.6 J3.3 R23.2 R24.2 R25.2 R26.2 R42.2
+5: C22.2 C23.2 D11.1 D12.1 J2.4 J12.3 J13.3 L3.2 Q1.3 R15.2
+5V: C28.2 C29.2 IC5.8 R22.2
+VIN: C8.1 C9.2 C10.1 C21.2 IC2.4 J2.2 PS2.3 Q2.5 Q2.6 Q2.7 Q2.8 Q2.9 R12.1
ADC_0: J2.13
ADC_1: C31.1 J2.15 R31.2 R32.1
ADC_2: C30.1 J2.17 R29.2 R30.1
BUZZER: J2.9 R4.2
DAC_1: J2.14 R33.1
DE: IC5.2 IC5.3 J2.20 R24.1 R25.1
DI: IC5.4 J2.18 R23.1
DIF_ADC: C36.1 J2.19 R41.2
FLOAT_IN: J2.12 R1.1
GND: C1.1 C2.2 C8.2 C9.1 C10.2 C21.1 C23.1 C28.1 C29.1 C30.2 C31.2 C32.2 C36.2 C37.2 C38.2 D1.2 D2.1 D3.1 D6.2 D7.C D10.2 D11.2 D12.2 D13.2 D14.2 D15.3 D16.2 D17.2 IC2.2 IC5.5 IC6.4 J1.2 J2.1 J2.3 J2.5 J3.4 J6.2 J11.3 J12.1 J13.1 J14.2 LS1.2 PS2.1 R5.2 R16.1 R28.1 R30.2 R32.2 R43.1
I2C_1_CLK: D2.2 J2.8 J3.2
I2C_1_SDA: D3.2 J2.10 J3.1
NetC1_2: C1.2 C35.1 IC6.2 R35.2
NetC2_1: C2.1 C35.2 IC6.3 R36.2
NetC15_1: C15.1 D6.1 IC2.3 IC2.6 J6.1 Q2.1 Q2.2 Q2.3 Q2.10
NetC15_2: C15.2 IC2.1
NetC20_1: C20.1 L3.1 PS2.2
NetC20_2: C20.2 PS2.6
NetC22_1: C22.1 PS2.4 R15.1 R16.2
NetC37_1: C37.1 C38.1 IC6.5 R42.1 R43.2
NetD1_1: D1.1 J1.1 R1.2
NetD7_A: D7.A R12.2
NetD10_1: D10.1 J12.2 R29.1
NetD13_1: D13.1 J13.2 R31.1
NetD14_1: D14.1 J14.1 R33.2
NetD15_1: D15.1 IC5.7 J11.2 R27.2 R28.2
NetD15_2: D15.2 IC5.6 J11.1 R22.1 R27.1
NetD16_1: D16.1 J15.2 R36.1
NetD17_1: D17.1 J15.1 R35.1
NetIC2_5: IC2.5 Q2.4
NetIC6_1: IC6.1 R34.1
NetIC6_6: IC6.6 R41.1
NetIC6_8: IC6.8 R34.2
NetLS1_1: LS1.1 Q1.2
NetQ1_1: Q1.1 R4.1 R5.1
RO: IC5.1 J2.16 R26.1
USB_VBUS: J2.11
pads on no net: J2.7 PS2.5

## Silkscreen, mask and mechanical layers (free items; w line width, h text height)
Top Overlay:
  lines w10: 2950,2386 ccw(c3000,2386) 3000,2336 4882,2336 ccw(c4882,2386) 4932,2386 4932,4604 ccw(c4882,4604) 4882,4654 3000,4654 ccw(c3000,4604) 2950,4604 2950,3450 2950,2386
Mechanical 15:
  lines w10: 1875,1050 ccw(c1925,1050) 1925,1000 4085,1000 6055,1000 ccw(c6055,1050) 6105,1050 6105,4820 ccw(c6055,4820) 6055,4870 1925,4870 ccw(c1925,4820) 1875,4820 1875,1050 ; 3417.56,2406.6 4462.44,2406.6 4462.44,2631.4 3417.56,2631.4 3417.56,2406.6